# EAGLE board esquematico (EAGLE 9.6.2)

Size 160 x 100 mm. Coordinates in mm from the lower left corner, seen from the top.
Outline: 0,0 160,0 160,100 0,100 0,0
Copper layers (1*16): Top 0.035mm / dielectric 1.5mm / Bottom 0.035mm
Design rules "default": minimum track width 6mil, minimum drill 0.35mm, track to track 6mil, track to pad 6mil, pad to pad 6mil, via to via 6mil, smd to smd 6mil, copper to edge 40mil, drill to drill 6mil, minimum pad ring 10mil, minimum via ring 8mil, stop-mask expansion 4mil, vias tented up to drill 0mil, thermal gap 10mil

## Footprints (pad centres in the part's own frame; a part is rotated, then mirrored left to right if it is on the bottom)
BATTERY_1236_C = drill 1.27 pad 2.032: + 0,0; - 0,20.32
C0603 = smd 1.1 x 1: 1 -0.85,0; 2 0.85,0
C050-025X075 = drill 0.813 octagon: 1 -2.54,0; 2 2.54,0
DO35-10 = drill 0.813 long: A 5.08,0; C -5.08,0
SOT223 = smd 1.5 x 2: 1 -2.3,-3.15; 2 0,-3.15; 3 2.3,-3.15 | smd 3.8 x 2: 4 0,3.15
CQ1 = drill 1.5: 1 4.5,-5; 2 4.5,5; C 7,0; NC -5.7,-5; NO -5.7,5
0207/10 = drill 0.813 octagon: 1 -5.08,0; 2 5.08,0
TO92 = drill 0.813 octagon: 1 1.27,0; 2 0,1.905; 3 -1.27,0
SO08-0.15 = smd 0.6 x 1.2: 1 -1.905,-2.8; 2 -0.635,-2.8; 3 0.635,-2.8; 4 1.905,-2.8; 5 1.905,2.8; 6 0.635,2.8; 7 -0.635,2.8; 8 -1.905,2.8
XTAL3215 = smd 1.1 x 1.9: P$1 1.2,0; P$2 -1.2,0

## Placement (x,y rotation side)
BAT1  BATTERY_1236_C  [BATTERY_1236_C]  81.28,36.83 0 top
C1  100nF  [C0603]  55.88,50.8 90 top
C2  [C050-025X075]  135.89,59.69 180 top
C3  [C050-025X075]  135.89,74.93 180 top
D1  1N4446  [DO35-10]  48.26,77.47 270 top
IC1  LD117AS33TR  [SOT223]  138.43,67.31 0 top
K1  CQ1-12V  [CQ1]  63.5,77.47 180 top
R1  [0207/10]  43.18,77.47 270 top
R2  [0207/10]  38.1,77.47 270 top
R4  [0207/10]  39.37,50.8 90 top
R5  [0207/10]  49.53,57.15 0 top
T1  BC337  [TO92]  43.18,66.04 180 top
U1  DS1307Z  [SO08-0.15]  49.53,49.53 0 top
X1  32.768KHZ  [XTAL3215]  49.53,38.1 0 top

## Library data of the parts
BAT1 = Itead_BP_110825.lbr
C1-C3 = rcl; SPICEPREFIX: C
D1 = diode
IC1 = v-reg
K1 = relay; OC_FARNELL: unknown; OC_NEWARK: unknown
R1 R2 R4 R5 = rcl; SPICEPREFIX: R
T1 = transistor
U1 = SparkFun-Clocks; PROD_ID: IC-08138
X1 = adafruit

## Nets
3.3V: C3.1 IC1.4
12V: C2.1 IC1.3
GND: BAT1.- C1.1 U1.4
N$1: U1.1 X1.P$2
N$2: U1.2 X1.P$1
N$3: D1.A K1.2 T1.3
N$4: BAT1.+ U1.3
N$5: D1.C K1.1
N$6: R1.2 R2.2 T1.2
N$7: K1.NO
N$9: K1.C
SCL: R4.1 U1.6
SDA: R5.2 U1.5
SQW: U1.7
TIER: C2.2 C3.2 IC1.1
TIERR: R2.1
TIERRA: T1.1
VCC: C1.2 R4.2 R5.1 U1.8
VIN: R1.1

## Tracks (layer width: path | path; a pad name or v marks a point on that pad's centre or on a via)
3.3V  (1 unrouted)
12V  (1 unrouted)
GND  (2 unrouted)
N$1  (1 unrouted)
N$2  (1 unrouted)
N$3  (2 unrouted)
N$4  (1 unrouted)
N$5  (1 unrouted)
N$6  (2 unrouted)
SCL  (1 unrouted)
SDA  (1 unrouted)
TIER  (2 unrouted)
VCC  (3 unrouted)